# Altium PCB PCB.PcbDoc
Units mm, origin at the board's own origin, x right, y up, seen from the top; angles counter-clockwise.
Board outline 170 x 120 mm, 2 copper layers (Top Layer, Bottom Layer); 137 components, 99 nets, 731 pads, 3 vias.
Unrouted connection lines stored in the file: 228.
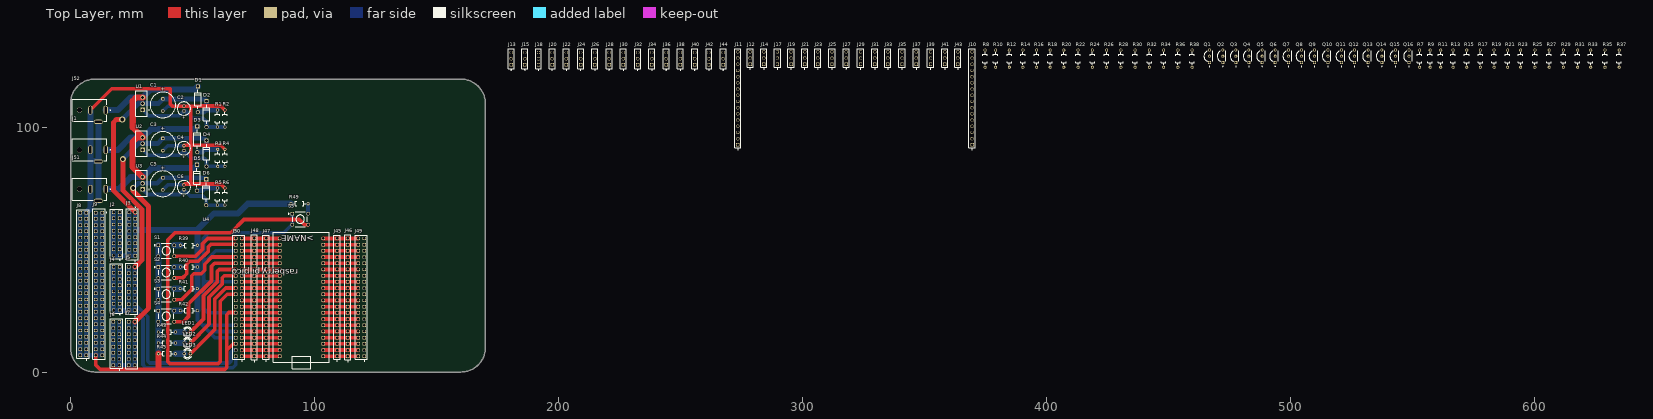
[diagram p0: Top Layer view]
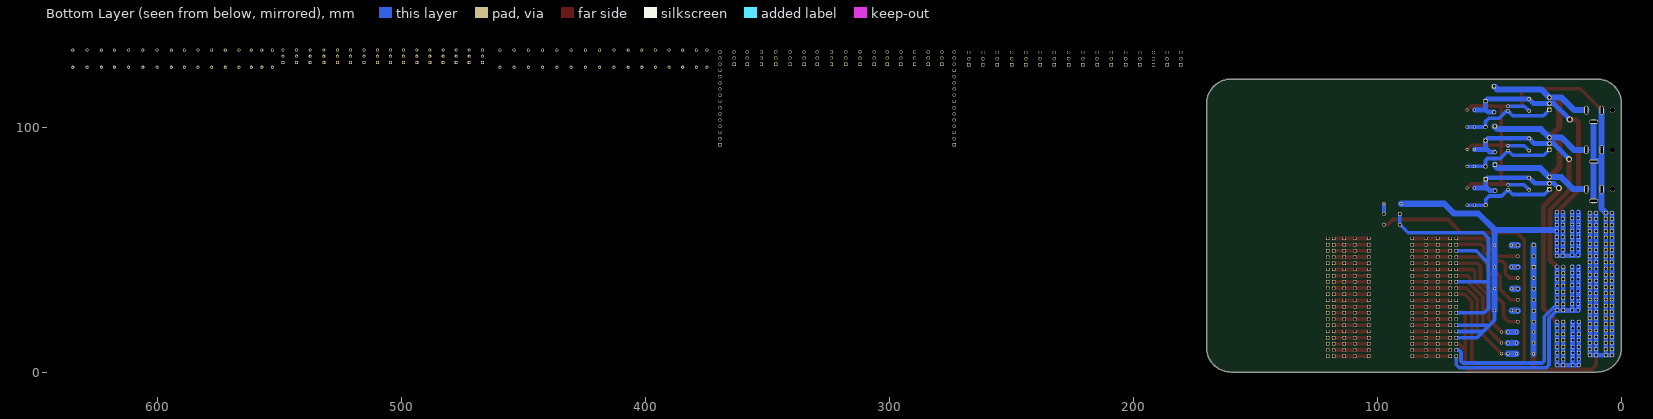
[diagram p1: Bottom Layer view, seen from below]

## Layer stack, top to bottom
Top Solder: solder mask 0.0102, Solder Resist, Dk 3.5
Top Layer: signal copper 0.0356
Dielectric 1: dielectric 0.32, FR-4, Dk 4.8
Bottom Layer: signal copper 0.0356
Bottom Solder: solder mask 0.0102, Solder Resist, Dk 3.5

## Board outline
0.006,10.006 0.006,110.006 cw(c10.006,110.006) 10.006,120.006 160.006,120.006 cw(c160.006,110.006) 170.006,110.006 170.006,10.006 cw(c160.006,10.006) 160.006,0.006 10.006,0.006 cw(c10.006,10.006)

## Design rules (kind name [scope] priority, off if disabled: settings)
Clearance [All] p1: gap=0.254 ignorepadtopadclearanceinfootprint=FALSE
PolygonConnect [All] p1: connectstyle=Relief reliefconductorwidth=0.254 reliefentries=4 polygonreliefangle="90 Angle" airgapwidth=0.254
RoutingCorners [All] p1: cornerstyle=90-Degree minsetback=2.54 maxsetback=2.54
RoutingVias [All] p1: holewidth=0.711 width=1.27 viastyle="Through Hole" minholewidth=0.711 minwidth=1.27 maxholewidth=0.711 maxwidth=1.27
SolderMaskExpansion [All] p1: expansion=0.102 istentingtop=FALSE
Width [All] p1: maxlimit=2.5 minlimit=1.5 preferedwidth=2 minimp=50.000000 maximp=50.000000 favimp=50.000000
29 further rules are at their usual default settings.

## Classes and differential pairs
component class Controller_Schematic: J45 J46 J47 J48 J49 J50 LED1 LED2 LED3 R39 R40 R41 R42 R43 R44 R45 R49 S1 S2 S3 S4 S5 U4
component class LogicShifters_Schematic: J10 J11 J12 J13 J14 J15 J17 J18 J19 J20 J21 J22 J23 J24 J25 J26 J27 J28 J29 J30 J31 J32 J33 J34 J35 J36 J37 J38 J39 J40 J41 J42 J43 J44 Q1 Q2 Q3 Q4 Q5 Q6 Q7 Q8 Q9 Q10 Q11 Q12 Q13 Q14 Q15 Q16 R7 R8 R9 R10 R11 R12 R13 R14 R15 R16 R17 R18 R19 R20 R21 R22 R23 R24 R25 R26 R27 R28 R29 R30 R31 R32 R33 R34 R35 R36 R37 R38
component class PowerSupply_Schematic: C1 C2 C3 C4 C5 C6 D1 D2 D3 D4 D5 D6 J1 J2 J3 J4 J5 J6 J7 J8 J9 J51 J52 R1 R2 R3 R4 R5 R6 U1 U2 U3

## Components (designator, comment, footprint, x,y, rotation, side; value= is the part's Value field where it differs from the comment)
C1 "1000µF" WCAP-ATG5_D10H12.5 37.846,109.434 r90 top
C2 "10µF" WCAP-ATG5_D5H11 46.482,107.95 r270 top
C3 "1000µF" WCAP-ATG5_D10H12.5 37.846,93.218 r90 top
C4 "10µF" WCAP-ATG5_D5H11 46.482,91.71 r270 top
C5 "1000µF" WCAP-ATG5_D10H12.5 37.846,77.129 r90 top
C6 "10µF" WCAP-ATG5_D5H11 46.482,75.708 r270 top
D1 "1N4007" DIOAD1060W80L520D270 52.197,111.76 r270 top
D2 "1N4007" DIOAD1060W80L520D270 55.753,105.664 r270 top
D3 "1N4007" DIOAD1060W80L520D270 51.943,95.377 r270 top
D4 "1N4007" DIOAD1060W80L520D270 55.753,89.535 r270 top
D5 "1N4007" DIOAD1060W80L520D270 51.816,79.629 r270 top
D6 "1N4007" DIOAD1060W80L520D270 55.626,73.694 r270 top
J1 "PJ-057AH" CUI_PJ-057AH 14.408,91.059 r0 top
J2 "TSW-108-07-G-D" SAMTEC_TSW-108-07-G-D 18.923,56.642 r90 top
J3 "SSW-108-01-G-D" SAMTEC_SSW-108-01-G-D 26.543,65.405 r90 top
J4 "TSW-108-07-G-D" SAMTEC_TSW-108-07-G-D 18.923,34.29 r90 top
J5 "SSW-108-01-G-D" SAMTEC_SSW-108-01-G-D 26.416,43.053 r90 top
J6 "TSW-108-07-G-D" SAMTEC_TSW-108-07-G-D 18.796,11.684 r90 top
J7 "SSW-108-01-G-D" SAMTEC_SSW-108-01-G-D 26.416,20.574 r90 top
J8 "TSW-124-07-G-D" SAMTEC_TSW-124-07-G-D 5.207,36.068 r90 top
J9 "SSW-124-01-X-D" SAMTEC_SSW-124-01-X-D 11.684,36.068 r90 top
J10 "TSW-116-07-G-S" SAMTEC_TSW-116-07-G-S 369.443,112.141 r90 top
J11 "SSW-116-01-G-S" SAMTEC_TSW-116-07-G-S 273.431,112.141 r90 top
J12 "TSW-103-07-G-S" SAMTEC_TSW-103-07-G-S 278.511,128.651 r90 top
J13 "SSW-103-01-G-S" SAMTEC_SSW-103-01-G-S 180.594,125.857 r90 top
J14 "TSW-103-07-G-S" SAMTEC_TSW-103-07-G-S 284.099,128.651 r90 top
J15 "SSW-103-01-G-S" SAMTEC_SSW-103-01-G-S 186.182,125.857 r90 top
J17 "TSW-103-07-G-S" SAMTEC_TSW-103-07-G-S 289.687,128.651 r90 top
J18 "SSW-103-01-G-S" SAMTEC_SSW-103-01-G-S 191.77,125.857 r90 top
J19 "TSW-103-07-G-S" SAMTEC_TSW-103-07-G-S 295.275,128.651 r90 top
J20 "SSW-103-01-G-S" SAMTEC_SSW-103-01-G-S 197.358,125.857 r90 top
J21 "TSW-103-07-G-S" SAMTEC_TSW-103-07-G-S 300.863,128.651 r90 top
J22 "SSW-103-01-G-S" SAMTEC_SSW-103-01-G-S 203.2,125.857 r90 top
J23 "TSW-103-07-G-S" SAMTEC_TSW-103-07-G-S 306.197,128.651 r90 top
J24 "SSW-103-01-G-S" SAMTEC_SSW-103-01-G-S 209.042,125.857 r90 top
J25 "TSW-103-07-G-S" SAMTEC_TSW-103-07-G-S 312.039,128.651 r90 top
J26 "SSW-103-01-G-S" SAMTEC_SSW-103-01-G-S 214.884,125.857 r90 top
J27 "TSW-103-07-G-S" SAMTEC_TSW-103-07-G-S 317.881,128.651 r90 top
J28 "SSW-103-01-G-S" SAMTEC_SSW-103-01-G-S 220.726,125.857 r90 top
J29 "TSW-103-07-G-S" SAMTEC_TSW-103-07-G-S 323.723,128.651 r90 top
J30 "SSW-103-01-G-S" SAMTEC_SSW-103-01-G-S 226.568,125.857 r90 top
J31 "TSW-103-07-G-S" SAMTEC_TSW-103-07-G-S 329.565,128.651 r90 top
J32 "SSW-103-01-G-S" SAMTEC_SSW-103-01-G-S 232.41,125.857 r90 top
J33 "TSW-103-07-G-S" SAMTEC_TSW-103-07-G-S 334.899,128.651 r90 top
J34 "SSW-103-01-G-S" SAMTEC_SSW-103-01-G-S 238.252,125.857 r90 top
J35 "TSW-103-07-G-S" SAMTEC_TSW-103-07-G-S 340.741,128.651 r90 top
J36 "SSW-103-01-G-S" SAMTEC_SSW-103-01-G-S 244.094,125.857 r90 top
J37 "TSW-103-07-G-S" SAMTEC_TSW-103-07-G-S 346.583,128.651 r90 top
J38 "SSW-103-01-G-S" SAMTEC_SSW-103-01-G-S 249.936,125.857 r90 top
J39 "TSW-103-07-G-S" SAMTEC_TSW-103-07-G-S 352.425,128.651 r90 top
J40 "SSW-103-01-G-S" SAMTEC_SSW-103-01-G-S 255.778,125.857 r90 top
J41 "TSW-103-07-G-S" SAMTEC_TSW-103-07-G-S 358.267,128.651 r90 top
J42 "SSW-103-01-G-S" SAMTEC_SSW-103-01-G-S 261.62,125.857 r90 top
J43 "TSW-103-07-G-S" SAMTEC_TSW-103-07-G-S 363.601,128.651 r90 top
J44 "SSW-103-01-G-S" SAMTEC_SSW-103-01-G-S 267.462,125.857 r90 top
J45 "TSW-120-07-G-S" SAMTEC_TSW-120-07-G-S 109.22,30.607 r90 top
J46 "SSW-120-01-X-S" SAMTEC_SSW-120-01-X-S 113.665,30.607 r90 top
J47 "TSW-120-07-G-S" SAMTEC_TSW-120-07-G-S 80.137,30.607 r90 top
J48 "SSW-120-01-X-S" SAMTEC_SSW-120-01-X-S 75.311,30.607 r90 top
J49 "TSW-120-07-G-D" SAMTEC_TSW-120-07-G-D 119.126,30.607 r90 top
J50 "TSW-120-07-G-D" SAMTEC_TSW-120-07-G-D 68.961,30.607 r90 top
J51 "PJ-057AH" CUI_PJ-057AH 14.408,74.93 r0 top
J52 "PJ-057AH" CUI_PJ-057AH 14.408,107.315 r0 top
LED1 "TLLR4400" LED3MM 47.879,16.383 r180 top
LED2 "TLLR4400" LED3MM 47.879,11.938 r180 top
LED3 "TLLR4400" LED3MM 47.879,7.493 r180 top
Q1 "2N7000" TO92254P458H750-3 466.725,129.413 r90 top
Q2 "2N7000" TO92254P458H750-3 472.186,129.413 r90 top
Q3 "2N7000" TO92254P458H750-3 477.52,129.413 r90 top
Q4 "2N7000" TO92254P458H750-3 482.854,129.413 r90 top
Q5 "2N7000" TO92254P458H750-3 488.315,129.413 r90 top
Q6 "2N7000" TO92254P458H750-3 493.649,129.413 r90 top
Q7 "2N7000" TO92254P458H750-3 499.11,129.413 r90 top
Q8 "2N7000" TO92254P458H750-3 504.444,129.413 r90 top
Q9 "2N7000" TO92254P458H750-3 509.778,129.413 r90 top
Q10 "2N7000" TO92254P458H750-3 515.239,129.413 r90 top
Q11 "2N7000" TO92254P458H750-3 520.827,129.413 r90 top
Q12 "2N7000" TO92254P458H750-3 526.161,129.413 r90 top
Q13 "2N7000" TO92254P458H750-3 531.749,129.413 r90 top
Q14 "2N7000" TO92254P458H750-3 537.337,129.413 r90 top
Q15 "2N7000" TO92254P458H750-3 542.925,129.413 r90 top
Q16 "2N7000" TO92254P458H750-3 548.513,129.413 r90 top
R1 "1k" RESAD700W45L350D185 60.198,103.886 r90 top
R2 "1.64k" RESAD700W45L350D185 63.246,103.886 r270 top
R3 "1k" RESAD700W45L350D185 60.325,87.757 r90 top
R4 "1k" RESAD700W45L350D185 63.246,87.757 r270 top
R5 "1k" RESAD700W45L350D185 60.198,71.882 r90 top
R6 "3.8k" RESAD700W45L350D185 63.246,71.882 r270 top
R7 "10k" RESAD700W45L350D185 552.831,128.397 r90 top
R8 "10k" RESAD700W45L350D185 374.777,128.397 r90 top
R9 "10k" RESAD700W45L350D185 557.149,128.397 r90 top
R10 "10k" RESAD700W45L350D185 379.095,128.397 r90 top
R11 "10k" RESAD700W45L350D185 561.467,128.397 r90 top
R12 "10k" RESAD700W45L350D185 384.683,128.397 r90 top
R13 "10k" RESAD700W45L350D185 566.547,128.397 r90 top
R14 "10k" RESAD700W45L350D185 390.271,128.397 r90 top
R15 "10k" RESAD700W45L350D185 572.135,128.397 r90 top
R16 "10k" RESAD700W45L350D185 395.859,128.397 r90 top
R17 "10k" RESAD700W45L350D185 577.723,128.397 r90 top
R18 "10k" RESAD700W45L350D185 401.447,128.397 r90 top
R19 "10k" RESAD700W45L350D185 583.311,128.397 r90 top
R20 "10k" RESAD700W45L350D185 407.035,128.397 r90 top
R21 "10k" RESAD700W45L350D185 588.899,128.397 r90 top
R22 "10k" RESAD700W45L350D185 412.877,128.397 r90 top
R23 "10k" RESAD700W45L350D185 594.233,128.397 r90 top
R24 "10k" RESAD700W45L350D185 418.719,128.397 r90 top
R25 "10k" RESAD700W45L350D185 600.075,128.397 r90 top
R26 "10k" RESAD700W45L350D185 424.561,128.397 r90 top
R27 "10k" RESAD700W45L350D185 605.917,128.397 r90 top
R28 "10k" RESAD700W45L350D185 430.403,128.397 r90 top
R29 "10k" RESAD700W45L350D185 611.759,128.397 r90 top
R30 "10k" RESAD700W45L350D185 436.245,128.397 r90 top
R31 "10k" RESAD700W45L350D185 617.601,128.397 r90 top
R32 "10k" RESAD700W45L350D185 442.087,128.397 r90 top
R33 "10k" RESAD700W45L350D185 622.935,128.397 r90 top
R34 "10k" RESAD700W45L350D185 447.929,128.397 r90 top
R35 "10k" RESAD700W45L350D185 628.777,128.397 r90 top
R36 "10k" RESAD700W45L350D185 453.771,128.397 r90 top
R37 "10k" RESAD700W45L350D185 634.619,128.397 r90 top
R38 "10k" RESAD700W45L350D185 459.613,128.397 r90 top
R39 "10k" RESAD700W45L350D185 48.514,51.943 r0 top
R40 "10k" RESAD700W45L350D185 48.514,43.053 r0 top
R41 "10k" RESAD700W45L350D185 48.458,34.163 r0 top
R42 "10k" RESAD700W45L350D185 48.514,25.146 r0 top
R43 "10" RESAD700W45L350D185 39.497,16.383 r0 top
R44 "10" RESAD700W45L350D185 39.497,11.938 r0 top
R45 "10" RESAD700W45L350D185 39.497,7.493 r0 top
R49 "10k" RESAD700W45L350D185 93.853,68.961 r180 top
S1 "FSM8JH" SW_FSM8JH 39.243,49.693 r0 top
S2 "FSM8JH" SW_FSM8JH 39.243,40.767 r0 top
S3 "FSM8JH" SW_FSM8JH 39.243,31.877 r0 top
S4 "FSM8JH" SW_FSM8JH 39.243,22.86 r0 top
S5 "FSM8JH" SW_FSM8JH 94.107,62.611 r0 top
U1 "LM338T-3.3V" TO254P1054X470X1955-3 29.591,109.982 r90 top
U2 "LM338T-5V" TO254P1054X470X1955-3 29.591,93.599 r90 top
U3 "LM338T-6V" TO254P1054X470X1955-3 29.591,77.343 r90 top
U4 "RASPBERRY_PI_PICO" RASPBERRY_PI_PICO 94.615,29.337 r180 top

## Footprints (in the part's own frame and the unit in brackets; to place one, negate y for a bottom-side part, rotate by r counter-clockwise, add the part's x,y. Pads: shape width x height; smd on the part's side, far side on the other; paste and mask are expansions set on the pad)
CUI_PJ-057AH [mm]
  oval 1.8x3.6 hole 0.8 slot 3 at 90 deg: 1(0,0) 2(-6.25,0)
  oval 3.6x1.8 hole 0.8 slot 3 at 0 deg: 3(-3,-4.8)
  round 2.1 hole 2.1 unplated: ""(-10.75,0)
  silkscreen extent -13.75,-4.5 2,4.5, body extent 2.4,-2.9 11.9,11.4, height 5.5
DIOAD1060W80L520D270 [mm]
  round 1.65 hole 1.1: A(5.3,0)
  rect 1.65x1.65 / inner round 1.65 / far side rect 1.65x1.65 hole 1.1: C(-5.3,0)
  silkscreen extent -3.9,-1.35 3.9,1.35, body extent -5.57,-1.35 5.57,1.35, height 2.7
LED3MM [mil]
  round 52 hole 32: A(-50,0) K(50,0)
  silkscreen extent -71,-80 61,80, body extent -60,-62 60,62, height 240
RASPBERRY_PI_PICO [mm]
  rect 1.37x1.37 hole 1.02: 3V3(8.89,12.7) 3V3_EN(8.89,15.24) ADC_VREF(8.89,10.16) AGND(8.89,5.08) GND(8.89,17.78) GND2(8.89,-7.62) GND3(8.89,-20.32) GND4(-8.89,17.78) GND5(-8.89,5.08) GND6(-8.89,-7.62) GND7(-8.89,-20.32) GP0(-8.89,22.86) GP1(-8.89,20.32) GP2(-8.89,15.24) GP3(-8.89,12.7) GP4(-8.89,10.16) GP5(-8.89,7.62) GP6(-8.89,2.54) GP7(-8.89,0) GP8(-8.89,-2.54) GP9(-8.89,-5.08) GP10(-8.89,-10.16) GP11(-8.89,-12.7) GP12(-8.89,-15.24) GP13(-8.89,-17.78) GP14(-8.89,-22.86) GP15(-8.89,-25.4) GP16(8.89,-25.4) GP17(8.89,-22.86) GP18(8.89,-17.78) GP19(8.89,-15.24) GP20(8.89,-12.7) GP21(8.89,-10.16) GP22(8.89,-5.08) GP26_A0(8.89,0) GP27_A1(8.89,2.54) GP28_A2(8.89,7.62) RUN(8.89,-2.54) VBUS(8.89,22.86) VSYS(8.89,20.32)
  silkscreen extent -11.43,-27.94 11.43,27.94, body extent -10.5,-25.5 10.5,26.8, height 3.73
RESAD700W45L350D185 [mm]
  round 1.258 hole 0.75: 1(-3.5,0) 2(3.5,0)
  silkscreen extent -2.55,-0.92 2.55,0.92, body extent -3.72,-0.92 3.72,0.92, height 1.84
SAMTEC_SSW-103-01-G-S [mm]
  rect 1.39x1.39 hole 1.04: 01(0,0)
  round 1.39 hole 1.04: 02(2.54,0) 03(5.08,0)
  silkscreen extent -2.27,-1.21 6.61,1.21
SAMTEC_SSW-108-01-G-D [mm]
  rect 1.37x1.37 hole 1.02: 01(0,0) 02(0,2.54) 03(-2.54,0) 04(-2.54,2.54) 05(-5.08,0) 06(-5.08,2.54) 07(-7.62,0) 08(-7.62,2.54) 09(-10.16,0) 10(-10.16,2.54) 11(-12.7,0) 12(-12.7,2.54) 13(-15.24,0) 14(-15.24,2.54) 15(-17.78,0) 16(-17.78,2.54)
  silkscreen extent -19.31,-1.21 2.27,3.75
SAMTEC_SSW-120-01-X-S [mm]
  rect 1.37x1.37 hole 1.02: 01(-24.13,0) 02(-21.59,0) 03(-19.05,0) 04(-16.51,0) 05(-13.97,0) 06(-11.43,0) 07(-8.89,0) 08(-6.35,0) 09(-3.81,0) 10(-1.27,0) 11(1.27,0) 12(3.81,0) 13(6.35,0) 14(8.89,0) 15(11.43,0) 16(13.97,0) 17(16.51,0) 18(19.05,0) 19(21.59,0) 20(24.13,0)
  silkscreen extent -26.38,-1.2 25.66,1.2
SAMTEC_SSW-124-01-X-D [mm]
  rect 1.37x1.37 hole 1.02: 01(29.21,-1.27) 02(29.21,1.27) 03(26.67,-1.27) 04(26.67,1.27) 05(24.13,-1.27) 06(24.13,1.27) 07(21.59,-1.27) 08(21.59,1.27) 09(19.05,-1.27) 10(19.05,1.27) 11(16.51,-1.27) 12(16.51,1.27) 13(13.97,-1.27) 14(13.97,1.27) 15(11.43,-1.27) 16(11.43,1.27) 17(8.89,-1.27) 18(8.89,1.27) 19(6.35,-1.27) 20(6.35,1.27) 21(3.81,-1.27) 22(3.81,1.27) 23(1.27,-1.27) 24(1.27,1.27) 25(-1.27,-1.27) 26(-1.27,1.27) 27(-3.81,-1.27) 28(-3.81,1.27) 29(-6.35,-1.27) 30(-6.35,1.27) 31(-8.89,-1.27) 32(-8.89,1.27) 33(-11.43,-1.27) 34(-11.43,1.27) 35(-13.97,-1.27) 36(-13.97,1.27) 37(-16.51,-1.27) 38(-16.51,1.27) 39(-19.05,-1.27) 40(-19.05,1.27) 41(-21.59,-1.27) 42(-21.59,1.27) 43(-24.13,-1.27) 44(-24.13,1.27) 45(-26.67,-1.27) 46(-26.67,1.27) 47(-29.21,-1.27) 48(-29.21,1.27)
  silkscreen extent -30.74,-3.23 30.74,2.47
SAMTEC_TSW-103-07-G-S [mm]
  rect 1.37x1.37 hole 1.02: 01(-2.54,0)
  round 1.37 hole 1.02: 02(0,0) 03(2.54,0)
  silkscreen extent -4.56,-1.27 3.81,1.27
SAMTEC_TSW-108-07-G-D [mm]
  rect 1.37x1.37 hole 1.02: 01(-8.89,-1.27) 02(-8.89,1.27) 03(-6.35,-1.27) 04(-6.35,1.27) 05(-3.81,-1.27) 06(-3.81,1.27) 07(-1.27,-1.27) 08(-1.27,1.27) 09(1.27,-1.27) 10(1.27,1.27) 11(3.81,-1.27) 12(3.81,1.27) 13(6.35,-1.27) 14(6.35,1.27) 15(8.89,-1.27) 16(8.89,1.27)
  silkscreen extent -10.91,-2.54 10.16,2.54
SAMTEC_TSW-116-07-G-S [mm]
  rect 1.37x1.37 hole 1.02: 01(-19.05,0)
  round 1.37 hole 1.02: 02(-16.51,0) 03(-13.97,0) 04(-11.43,0) 05(-8.89,0) 06(-6.35,0) 07(-3.81,0) 08(-1.27,0) 09(1.27,0) 10(3.81,0) 11(6.35,0) 12(8.89,0) 13(11.43,0) 14(13.97,0) 15(16.51,0) 16(19.05,0)
  silkscreen extent -21.07,-1.27 20.32,1.27
SAMTEC_TSW-120-07-G-D [mm]
  rect 1.37x1.37 hole 1.02: 01(-24.13,-1.27) 02(-24.13,1.27) 03(-21.59,-1.27) 04(-21.59,1.27) 05(-19.05,-1.27) 06(-19.05,1.27) 07(-16.51,-1.27) 08(-16.51,1.27) 09(-13.97,-1.27) 10(-13.97,1.27) 11(-11.43,-1.27) 12(-11.43,1.27) 13(-8.89,-1.27) 14(-8.89,1.27) 15(-6.35,-1.27) 16(-6.35,1.27) 17(-3.81,-1.27) 18(-3.81,1.27) 19(-1.27,-1.27) 20(-1.27,1.27) 21(1.27,-1.27) 22(1.27,1.27) 23(3.81,-1.27) 24(3.81,1.27) 25(6.35,-1.27) 26(6.35,1.27) 27(8.89,-1.27) 28(8.89,1.27) 29(11.43,-1.27) 30(11.43,1.27) 31(13.97,-1.27) 32(13.97,1.27) 33(16.51,-1.27) 34(16.51,1.27) 35(19.05,-1.27) 36(19.05,1.27) 37(21.59,-1.27) 38(21.59,1.27) 39(24.13,-1.27) 40(24.13,1.27)
  silkscreen extent -26.15,-2.54 25.4,2.54
SAMTEC_TSW-120-07-G-S [mm]
  rect 1.37x1.37 hole 1.02: 01(-24.13,0) 02(-21.59,0) 03(-19.05,0) 04(-16.51,0) 05(-13.97,0) 06(-11.43,0) 07(-8.89,0) 08(-6.35,0) 09(-3.81,0) 10(-1.27,0) 11(1.27,0) 12(3.81,0) 13(6.35,0) 14(8.89,0) 15(11.43,0) 16(13.97,0) 17(16.51,0) 18(19.05,0) 19(21.59,0) 20(24.13,0)
  silkscreen extent -26.15,-1.27 25.4,1.27
SAMTEC_TSW-124-07-G-D [mm]
  rect 1.37x1.37 hole 1.02: 01(-29.21,-1.27) 02(-29.21,1.27) 03(-26.67,-1.27) 04(-26.67,1.27) 05(-24.13,-1.27) 06(-24.13,1.27) 07(-21.59,-1.27) 08(-21.59,1.27) 09(-19.05,-1.27) 10(-19.05,1.27) 11(-16.51,-1.27) 12(-16.51,1.27) 13(-13.97,-1.27) 14(-13.97,1.27) 15(-11.43,-1.27) 16(-11.43,1.27) 17(-8.89,-1.27) 18(-8.89,1.27) 19(-6.35,-1.27) 20(-6.35,1.27) 21(-3.81,-1.27) 22(-3.81,1.27) 23(-1.27,-1.27) 24(-1.27,1.27) 25(1.27,-1.27) 26(1.27,1.27) 27(3.81,-1.27) 28(3.81,1.27) 29(6.35,-1.27) 30(6.35,1.27) 31(8.89,-1.27) 32(8.89,1.27) 33(11.43,-1.27) 34(11.43,1.27) 35(13.97,-1.27) 36(13.97,1.27) 37(16.51,-1.27) 38(16.51,1.27) 39(19.05,-1.27) 40(19.05,1.27) 41(21.59,-1.27) 42(21.59,1.27) 43(24.13,-1.27) 44(24.13,1.27) 45(26.67,-1.27) 46(26.67,1.27) 47(29.21,-1.27) 48(29.21,1.27)
  silkscreen extent -31.23,-2.54 30.48,2.54
SW_FSM8JH [mm]
  rect 1.498x1.498 / inner round 1.498 / far side rect 1.498x1.498 hole 0.99: 1(-3.25,2.25)
  round 1.498 hole 0.99: 2(-3.25,-2.25) 3(3.25,2.25) 4(3.25,-2.25)
  silkscreen extent -4.95,-3 3,3, body extent -3,-3.95 3,3.95, height 9.5
TO254P1054X470X1955-3 [mm]
  rect 1.86x1.86 / inner round 1.86 / far side rect 1.86x1.86 hole 1.24: 1(-2.54,0)
  round 1.86 hole 1.24: 2(0,0) 3(2.54,0)
  silkscreen extent -5.27,-2.64 5.27,2.86, body extent -5.08,-2.35 5.08,2.35, height 15.49
TO92254P458H750-3 [mm]
  rect 1.228x1.228 / inner round 1.228 / far side rect 1.228x1.228 hole 0.72: 1(-2.54,0)
  round 1.228 hole 0.72: 2(0,0) 3(2.54,0)
  silkscreen extent -4.25,-1.27 2.13,2.29, body extent -2.74,-1.27 2.74,2.33, height 8.09
WCAP-ATG5_D5H11 [mm] "Aluminum Electrolytic Capacitors, 5x11mm"
  rrect50% 1.3x1.3 hole 0.8: 1(1,0)
  round 1.3 hole 0.8: 2(-1,0)
  silkscreen extent -2.75,-2.75 2.75,2.75, body extent -2.49,-2.5 2.5,2.5, height 11.31
WCAP-ATG5_D10H12.5 [mm] "Aluminum Electrolytic Capacitors, 10x12.5mm"
  rrect50% 1.4x1.4 hole 0.9: 1(2.5,0)
  round 1.4 hole 0.9: 2(-2.5,0)
  silkscreen extent -5.25,-5.25 5.25,5.25, body extent -4.99,-5 5,5, height 12.81

## Part data
C1 C3 C5: library part 860020375017, "WCAP-ATG5 Aluminum Electrolytic Capacitor, Radial, THT, D10 x H12.5mm, 1000µF, 16V", Capacitance Tolerance=+/-20%, Leakage Current=160µA, Manufacturer="Wurth Elektronik", Operating Temperature Max=105°C, Operating Temperature Min=-40°C, Rated Voltage (DC)=16V, Ripple Current=540mA, Capacitance=1000µF, Category="Aluminum Electrolytic Capacitors", ComponentLink1Description="Website Link", ComponentLink1URL=https://www.we-online.com/redexpert/article/860020375017?ad, ComponentLink2Description="Datasheet Link", ComponentLink2URL=https://www.we-online.com/redexpert/spec/860020375017?ad, Diameter=10mm, Dissipation Factor=15%, Endurance=2000h, Height=12.5mm, Manufacturer Part Number=860020375017, Match Code=WCAP-ATG5, Mount="Through Hole", Packaging="Ammo Pack", Technical Reference=ATDF125102M016DSPA9B000
C2 C4 C6: library part 860020372001, "WCAP-ATG5 Aluminum Electrolytic Capacitor, Radial, THT, D5 x H11mm, 10µF, 16V", Capacitance Tolerance=+/-20%, Leakage Current=3µA, Manufacturer="Wurth Elektronik", Operating Temperature Max=105°C, Operating Temperature Min=-40°C, Rated Voltage (DC)=16V, Ripple Current=35mA, Capacitance=10µF, Category="Aluminum Electrolytic Capacitors", ComponentLink1Description="Website Link", ComponentLink1URL=https://www.we-online.com/redexpert/article/860020372001?ad, ComponentLink2Description="Datasheet Link", ComponentLink2URL=https://www.we-online.com/redexpert/spec/860020372001?ad, Diameter=5mm, Dissipation Factor=15%, Endurance=2000h, Height=11mm, Manufacturer Part Number=860020372001, Match Code=WCAP-ATG5, Mount="Through Hole", Packaging="Ammo Pack", Technical Reference=ATDC110100M016DSPA3B000
D1 D2 D3 D4 D5 D6: "Rectifier Silicon, 1000V, 1 A, DO-41 Case, Solder Leads, 1N Series", Package="DO-41 NTE Electronics", Check_prices=https://www.snapeda.com/parts/1N4007/NTE+Electronics/view-part/?ref=eda, MF="NTE Electronics, Inc.", MP=1N4007, SnapEDA_Link=https://www.snapeda.com/parts/1N4007/NTE+Electronics/view-part/?ref=snap
J1 J51 J52: "2.0 x 6.3 mm, 5.0 A, Horizontal, Through Hole, Pick-n-Place Top, Dc Power Jack Connector", Package=None, Check_prices=https://www.snapeda.com/parts/PJ-057AH/Same+Sky/view-part/?ref=eda, MF="Same Sky", MP=PJ-057AH, SnapEDA_Link=https://www.snapeda.com/parts/PJ-057AH/Same+Sky/view-part/?ref=snap
J2 J3 J4 J5 J6 J7 J8 J9 J10 J12 J13 J14 J15 J17 J18 J19 J20 J21 J22 J23 J24 J25 J26 J27 J28 J29 J30 J31 J32 J33 J34 J35 J36 J37 J38 J39 J40 J41 J42 J43 J44 J45 J47 J49 J50: Package=None, Availability=Unavailable, MF=Samtec, Price=None
  J2 J4 J6: MP=TSW-108-07-G-D
  J3 J5 J7: MP=SSW-108-01-G-D
  J8: MP=TSW-124-07-G-D
  J9: MP=SSW-124-01-X-D
  J10: MP=TSW-116-07-G-S
  J12 J14 J17 J19 J21 J23 J25 J27 J29 J31 J33 J35 J37 J39 J41 J43: MP=TSW-103-07-G-S
  J13 J15 J18 J20 J22 J24 J26 J28 J30 J32 J34 J36 J38 J40 J42 J44: MP=SSW-103-01-G-S
  J45 J47: MP=TSW-120-07-G-S
  J49 J50: MP=TSW-120-07-G-D
J11: library part TSW-116-07-G-S, Package=None, Availability=Unavailable, MF=Samtec, MP=TSW-116-07-G-S, Price=None
J46 J48: "SSW - Samtec 2.54mm Single Row Straight Socket Strip 8.5 Profile - Fast Stock", Package=None, Check_prices=https://www.snapeda.com/parts/SSW-120-01-G-S/Samtec/view-part/?ref=eda, MF=Samtec, MP=SSW-120-01-G-S, SnapEDA_Link=https://www.snapeda.com/parts/SSW-120-01-G-S/Samtec/view-part/?ref=snap
LED1 LED2 LED3: "Red 619nm LED Indication - Discrete 1.9V Radial", Package=None, Check_prices=https://www.snapeda.com/parts/TLLR4400/Vishay+Semiconductor+Opto+Division/view-part/?ref=eda, MF=Vishay, MP=TLLR4400, SnapEDA_Link=https://www.snapeda.com/parts/TLLR4400/Vishay+Semiconductor+Opto+Division/view-part/?ref=snap
Q1 Q2 Q3 Q4 Q5 Q6 Q7 Q8 Q9 Q10 Q11 Q12 Q13 Q14 Q15 Q16: "N-Channel 60 V 200mA (Ta) Through Hole TO-92", Package="TO-226-3 NTE Electronics, Inc.", Check_prices=https://www.snapeda.com/parts/2N7000/NTE+Electronics/view-part/?ref=eda, MF="NTE Electronics, Inc.", MP=2N7000, SnapEDA_Link=https://www.snapeda.com/parts/2N7000/NTE+Electronics/view-part/?ref=snap
R1 R2 R3 R4 R5 R6 R7 R8 R9 R10 R11 R12 R13 R14 R15 R16 R17 R18 R19 R20 R21 R22 R23 R24 R25 R26 R27 R28 R29 R30 R31 R32 R33 R34 R35 R36 R37 R38 R39 R40 R41 R42 R43 R44 R45 R49: library part 3-1623927-1, "1 MOhms Â±5% 0.25W, 1/4W Through Hole Resistor Axial - Carbon Film", Package=None, Check_prices=https://www.snapeda.com/parts/3-1623927-1/TE+Connectivity/view-part/?ref=eda, MF="TE Connectivity", MP=3-1623927-1, SnapEDA_Link=https://www.snapeda.com/parts/3-1623927-1/TE+Connectivity/view-part/?ref=snap
S1 S2 S3 S4 S5: "Tactile Switch SPST-NO Top Actuated Through Hole", Package=None, Availability="In Stock", Check_prices=https://www.snapeda.com/parts/FSM8JH/TE+Connectivity+ALCOSWITCH+Switches/view-part/?ref=eda, MF="TE Connectivity", MP=FSM8JH, Price=None, SnapEDA_Link=https://www.snapeda.com/parts/FSM8JH/TE+Connectivity+ALCOSWITCH+Switches/view-part/?ref=snap
U1 U2 U3: library part LM338T, "5-A, 40-V, low-IQ, adjustable linear voltage regulator 3-TO-220 0 to 125", Package="TO-220-3 Texas Instruments", Check_prices=https://www.snapeda.com/parts/LM338T/Texas+Instruments/view-part/?ref=eda, MF="Texas Instruments", MP=LM338T, SnapEDA_Link=https://www.snapeda.com/parts/LM338T/Texas+Instruments/view-part/?ref=snap
U4: "Raspberry Pi Board, Arm Cortex-M0+; Core Architecture:Arm; Core Sub-Architecture:Cortex-M0+; Kit Contents:Raspberry Pi Pico Board; No. Of Bits:32Bit; Silicon Core Number:Rp2040; Silicon Manufacturer:Raspberry Pi", Package=None, Check_prices=https://www.snapeda.com/parts/RASPBERRY%20PI%20PICO/Raspberry+Pi/view-part/?ref=eda, MF="Raspberry Pi", MP="RASPBERRY PI PICO", SnapEDA_Link=https://www.snapeda.com/parts/RASPBERRY%20PI%20PICO/Raspberry+Pi/view-part/?ref=snap

## Via types
v1: diameter 2.5/2.5 (per signal layer), hole 1.5, Top Layer to Bottom Layer, 3 vias

## Nets (pads, with @x,y where several pads share a name; then routed paths per layer and width w, separated by ;. In a path a pad name is that pad's centre, name@x,y a point inside that pad or via, vN(x,y) a via of type N, cw(c..) or ccw(c..) an arc to the next point about the centre after c; other vN are vias at no path point)
0V: C1.2 C2.2 C3.2 C4.2 C5.2 C6.2 J1.2 J1.3 J8.01 J8.02 J8.03 J8.04 J8.05 J8.06 J8.07 J8.08 J8.09 J8.10 J8.11 J8.12 J8.13 J8.14 J8.15 J8.16 J8.17 J8.18 J8.19 J8.20 J8.21 J8.22 J8.23 J8.24 J8.25 J8.26 J8.27 J8.28 J8.29 J8.30 J8.31 J8.32 J8.33 J8.34 J8.35 J8.36 J8.37 J8.38 J8.39 J8.40 J8.41 J8.42 J8.43 J8.44 J8.45 J8.46 J8.47 J8.48 J9.01 J9.02 J9.03 J9.04 J9.05 J9.06 J9.07 J9.08 J9.09 J9.10 J9.11 J9.12 J9.13 J9.14 J9.15 J9.16 J9.17 J9.18 J9.19 J9.20 J9.21 J9.22 J9.23 J9.24 J9.25 J9.26 J9.27 J9.28 J9.29 J9.30 J9.31 J9.32 J9.33 J9.34 J9.35 J9.36 J9.37 J9.38 J9.39 J9.40 J9.41 J9.42 J9.43 J9.44 J9.45 J9.46 J9.47 J9.48 J12.03 J13.01 J14.03 J15.01 J17.03 J18.01 J19.03 J20.01 J21.03 J22.01 J23.03 J24.01 J25.03 J26.01 J27.03 J28.01 J29.03 J30.01 J31.03 J32.01 J33.03 J34.01 J35.03 J36.01 J37.03 J38.01 J39.03 J40.01 J41.03 J42.01 J43.03 J44.01 J49.05 J49.15 J49.25 J49.35 J50.06 J50.16 J50.26 J50.36 J51.2 J51.3 J52.2 J52.3 R2.1 R4.1 R6.1 R43.1 R44.1 R45.1 S1.1 S1.2 S2.1 S2.2 S3.1 S3.2 S4.1 S4.2 S5.1 S5.2 | length 737.7
  Top Layer w1.5: J52.2 8.158,108.134 8.296,108.272 9.115,108.272 16.921,116.078 40.894,116.078 40.894,109.829 41.773,108.95 C2.2 49.276,108.95 ; J9.48 10.414,2.794 12.192,1.016 63.129,1.016 64.008,1.895 64.008,8.9 ; C6.2 46.789,77.015 49.276,77.015 ; C4.2 46.662,92.89 49.276,92.89 ; R6.1 61.613,77.015 49.276,77.015 ; R4.1 61.613,92.89 49.276,92.89 ; R2.1 61.613,109.019 53.713,109.019 53.644,108.95 49.276,108.95 ; J50.06 66.665,11.557 64.008,8.9 ; J50.16 67.564,24.384 64.897,24.384 64.008,23.495 64.008,8.9 ; 49.276,77.015 49.276,92.89 ; 49.276,92.89 49.276,108.95
  Top Layer w2.5: 35.997,1.834 R45.1
  Bottom Layer w1.5: J52.3 J52.3@11.43,102.537 ; J9.17 12.97,44.958 J9.17@13.196,45.184 ; C5.2 39.925,76.708 C6.2 ; C3.2 39.838,92.71 C4.2 ; C1.2 39.862,108.95 C2.2 ; J50.16 56.261,24.257 54.483,26.035 54.483,37.836 ; J50.26 55.362,36.957 54.483,37.836 ; J50.36 59.563,49.657 54.483,44.577 ; S5.1 S5.2 90.714,60.361 87.376,57.023 56.642,57.023 54.483,54.864 54.483,44.577 ; 54.483,37.836 54.483,44.577
  Bottom Layer w2: J8.48 J8.46 J8.44 J8.42 J8.40 J8.38 J8.36 J8.34 J8.32 J8.30 J8.28 J8.26 J8.24 J8.22 J8.20 J8.18 J8.16 J8.14 J8.12 J8.10 J8.08 J8.06 J8.04 J8.02 J8.01 ; J8.47 J8.45 J8.43 J8.41 J8.39 J8.37 J8.35 J8.33 J8.31 J8.29 J8.27 J8.25 J8.23 J8.21 J8.19 J8.17 J8.15 J8.13 J8.11 J8.09 J8.07 J8.05 J8.03 J8.01 ; J9.02 J9.04 J9.06 J9.08 J9.10 J9.12 J9.14 J9.16 J9.18 J9.20 J9.22 J9.24 J9.26 J9.28 J9.30 J9.32 J9.34 J9.36 J9.38 J9.40 J9.42 J9.44 J9.46 J9.48 ; J9.01 J9.03 J9.05 J9.07 J9.09 J9.11 J9.13 J9.15 J9.17 J9.19 J9.21 J9.23 J9.25 J9.27 J9.29 J9.31 J9.33 J9.35 J9.37 J9.39 J9.41 J9.43 J9.45 J9.47 J9.48 ; J8.01 J9.48
  Bottom Layer w2.5: J8.47 8.158,66.959 J51.2 8.158,86.487 ; J52.2 J1.2 8.158,86.487 ; J51.3 J1.3 ; J52.3 J1.3 ; S1.1 S1.2 S2.1 S2.2 S3.1 S3.2 S4.1 S4.2 35.993,7.497 R45.1 ; 8.158,86.487 11.18,86.487 J1.3
3.3V: C1.1 D1.A D2.C J2.01 J2.02 J2.03 J2.04 J2.05 J2.06 J2.07 J2.08 J2.09 J2.10 J2.11 J2.12 J2.13 J2.14 J2.15 J2.16 J3.01 J3.02 J3.03 J3.04 J3.05 J3.06 J3.07 J3.08 J3.09 J3.10 J3.11 J3.12 J3.13 J3.14 J3.15 J3.16 J50.08 J50.10 J50.12 Q1.2 Q2.2 Q3.2 Q4.2 Q5.2 Q6.2 Q7.2 Q8.2 Q9.2 Q10.2 Q11.2 Q12.2 Q13.2 Q14.2 Q15.2 Q16.2 R1.2 R8.2 R10.2 R12.2 R14.2 R16.2 R18.2 R20.2 R22.2 R24.2 R26.2 R28.2 R30.2 R32.2 R34.2 R36.2 R38.2 R39.2 R40.2 R41.2 R42.2 R49.2 U1.2 | length 323.2
  Top Layer w2: v1(21.209,103.505) 18.825,103.505 17.653,102.333 17.653,74.295 J3.01
  Bottom Layer w1.5: R42.2 52.014,21.265 54.102,19.177 ; D1.A D1.A@52.226,106.489 ; 55.208,111.934 55.753,111.389 D2.C ; 55.753,107.696 56.063,107.386 ; J50.08 59.182,14.097 56.642,16.637 ; J50.10 56.642,16.637 ; J50.12 54.102,19.177 ; 54.102,19.177 56.642,16.637
  Bottom Layer w2: J2.16 J2.14 J2.12 J2.10 J2.08 J2.06 J2.04 J2.02 17.78,47.625 J3.16 ; J2.01 J2.03 J2.05 J2.07 J2.09 J2.11 J2.13 J2.15 ; v1(21.209,103.505) 27.686,109.982 U1.2 ; J3.02 J3.04 J3.06 J3.08 J3.10 J3.12 J3.14 J3.16 ; J3.01 J3.03 J3.05 J3.07 J3.09 J3.11 J3.13 J3.15 J3.16 ; U1.2@29.845,109.982 36.021,109.982 C1.1@37.973,111.934 ; C1.1 55.208,111.934 ; D1.A@52.226,106.489 54.546,106.489 55.753,107.696 D2.C ; 56.063,107.386 R1.2
  Bottom Layer w2.5: J3.07@26.995,58.237 52.014,58.237 ; R42.2 R40.2 R39.2 52.014,58.237 ; R49.2 72.644,68.961 68.707,65.024 58.801,65.024 52.014,58.237
5V: C3.1 D3.A D4.C J4.01 J4.02 J4.03 J4.04 J4.05 J4.06 J4.07 J4.08 J4.09 J4.10 J4.11 J4.12 J4.13 J4.14 J4.15 J4.16 J5.01 J5.02 J5.03 J5.04 J5.05 J5.06 J5.07 J5.08 J5.09 J5.10 J5.11 J5.12 J5.13 J5.14 J5.15 J5.16 J50.02 J50.04 R3.2 R7.2 R9.2 R11.2 R13.2 R15.2 R17.2 R19.2 R21.2 R23.2 R25.2 R27.2 R29.2 R31.2 R33.2 R35.2 R37.2 U2.2 | length 312.1
  Top Layer w2: v1(21.463,87.249) 21.463,74.422 29.337,66.548 29.337,45.974 J5.01
  Bottom Layer w1.5: J5.15 29.718,21.971 29.718,2.95 30.89,1.778 66.519,1.778 67.691,2.95 J50.02 ; J5.13 31.623,22.606 31.623,4.562 32.502,3.683 64.907,3.683 65.786,4.562 65.786,8.138 66.665,9.017 J50.04 ; D3.A D3.A@51.972,90.106 ; 55.062,91.257 54.832,91.027 55.753,91.948 ; D4.C@55.678,94.927 55.678,94.91 D4.C
  Bottom Layer w2: J4.16 J4.14 J4.12 J4.10 J4.08 J4.06 J4.04 J4.02 17.78,25.273 J5.16 ; J4.01 J4.03 J4.05 J4.07 J4.09 J4.11 J4.13 J4.15 ; v1(21.463,87.249) 27.813,93.599 U2.2 35.727,93.599 C3.1 ; J5.02 J5.04 J5.06 J5.08 J5.10 J5.12 J5.14 J5.16 ; J5.01 J5.03 J5.05 J5.07 J5.09 J5.11 J5.13 J5.15 J5.16 ; C3.1@37.934,95.806 54.799,95.806 D4.C@55.678,94.927 ; D3.A@51.972,90.106 53.911,90.106 54.832,91.027 ; 55.062,91.257 R3.2 ; 55.753,91.948 D4.C
6V: C5.1 D5.A D6.C J6.01 J6.02 J6.03 J6.04 J6.05 J6.06 J6.07 J6.08 J6.09 J6.10 J6.11 J6.12 J6.13 J6.14 J6.15 J6.16 J7.01 J7.02 J7.03 J7.04 J7.05 J7.06 J7.07 J7.08 J7.09 J7.10 J7.11 J7.12 J7.13 J7.14 J7.15 J7.16 J12.02 J13.02 J14.02 J15.02 J17.02 J18.02 J19.02 J20.02 J21.02 J22.02 J23.02 J24.02 J25.02 J26.02 J27.02 J28.02 J29.02 J30.02 J31.02 J32.02 J33.02 J34.02 J35.02 J36.02 J37.02 J38.02 J39.02 J40.02 J41.02 J42.02 J43.02 J44.02 R5.2 U3.2 | length 184.8
  Top Layer w2: v1(25.654,75.438) 25.654,74.168 32.004,67.818 32.004,26.162 J7.01
  Bottom Layer w1.5: 53.882,74.329 53.975,74.422 54.102,74.422 ; 55.062,75.382 54.864,75.184 55.626,75.946
  Bottom Layer w2: J6.16 J6.14 J6.12 J6.10 J6.08 J6.06 J6.04 J6.02 J6.01 ; J6.15 J6.13 J6.11 J6.09 J6.07 J6.05 J6.03 J6.01 ; J7.02 J7.04 J7.06 J7.08 J7.10 J7.12 J7.14 J7.16 ; v1(25.654,75.438) 25.789,75.438 27.694,77.343 U3.2 35.56,77.343 C5.1 55.128,79.629 55.626,79.131 D6.C 55.626,75.946 ; J7.01 J7.03 J7.05 J7.07 J7.09 J7.11 J7.13 J7.15 J7.16 ; D5.A 53.882,74.329 ; 54.102,74.422 54.864,75.184 ; 55.062,75.382 R5.2 ; J6.01 J7.16
12V: D1.C D3.C D5.C J1.1 J51.1 J52.1 U1.3 U2.3 U3.3 | length 167.5
  Top Layer w2.5: U3.3 25.4,84.074 25.4,94.107 27.432,96.139 U2.3 25.527,100.203 25.527,111.058 26.991,112.522 U1.3
  Bottom Layer w2: J1.1@14.351,91.002 J1.1 ; J52.1@14.351,107.258 J52.1
  Bottom Layer w2.5: J51.1 19.758,74.93 24.711,79.883 U3.3 33.274,83.566 50.8,83.566 51.816,84.582 D5.C ; J1.1 19.509,91.059 24.589,96.139 U2.3 33.02,99.568 50.834,99.568 D3.C ; J52.1 19.446,107.315 24.653,112.522 U1.3 32.893,115.824 50.961,115.824 D1.C
"LogicShifter1 HV": J10.01 J11.01 J12.01 J13.03 Q1.3 R7.1
"LogicShifter1 LV": J49.01 Q1.1 R8.1
"LogicShifter2 HV": J10.02 J11.02 J14.01 J15.03 Q2.3 R9.1
"LogicShifter2 LV": J49.03 Q2.1 R10.1
"LogicShifter3 HV": J10.03 J11.03 J17.01 J18.03 Q3.3 R11.1
"LogicShifter3 LV": J49.07 Q3.1 R12.1
"LogicShifter4 HV": J10.04 J11.04 J19.01 J20.03 Q4.3 R13.1
"LogicShifter4 LV": J49.09 Q4.1 R14.1
"LogicShifter5 HV": J10.05 J11.05 J21.01 J22.03 Q5.3 R15.1
"LogicShifter5 LV": J49.11 Q5.1 R16.1
"LogicShifter6 HV": J10.06 J11.06 J23.01 J24.03 Q6.3 R17.1
"LogicShifter6 LV": J49.13 Q6.1 R18.1
"LogicShifter7 HV": J10.07 J11.07 J25.01 J26.03 Q7.3 R19.1
"LogicShifter7 LV": J49.17 Q7.1 R20.1
"LogicShifter8 HV": J10.08 J11.08 J27.01 J28.03 Q8.3 R21.1
"LogicShifter8 LV": J49.19 Q8.1 R22.1
"LogicShifter9 HV": J10.09 J11.09 J29.01 J30.03 Q9.3 R23.1
"LogicShifter9 LV": J49.21 Q9.1 R24.1
"LogicShifter10 HV": J10.10 J11.10 J31.01 J32.03 Q10.3 R25.1
"LogicShifter10 LV": J49.23 Q10.1 R26.1
"LogicShifter11 HV": J10.11 J11.11 J33.01 J34.03 Q11.3 R27.1
"LogicShifter11 LV": J49.27 Q11.1 R28.1
"LogicShifter12 HV": J10.12 J11.12 J35.01 J36.03 Q12.3 R29.1
"LogicShifter12 LV": J49.29 Q12.1 R30.1
"LogicShifter13 HV": J10.13 J11.13 J37.01 J38.03 Q13.3 R31.1
"LogicShifter13 LV": J49.31 Q13.1 R32.1
"LogicShifter14 HV": J10.14 J11.14 J39.01 J40.03 Q14.3 R33.1
"LogicShifter14 LV": J49.33 Q14.1 R34.1
"LogicShifter15 HV": J10.15 J11.15 J41.01 J42.03 Q15.3 R35.1
"LogicShifter15 LV": J49.37 Q15.1 R36.1
"LogicShifter16 HV": J10.16 J11.16 J43.01 J44.03 Q16.3 R37.1
"LogicShifter16 LV": J49.39 Q16.1 R38.1
NetC2_1: C2.1 D2.A R1.1 R2.2 U1.1 | length 39.5
  Bottom Layer w1.5: U1.1 32.004,105.029 44.561,105.029 C2.1 47.101,106.95 50.102,103.95 54.419,103.95 55.724,102.645 55.724,100.393 D2.A 55.775,100.386 R1.1 R2.2
NetC4_1: C4.1 D4.A R3.1 R4.2 U2.1 | length 39.5
  Bottom Layer w1.5: U2.1 31.877,88.773 44.545,88.773 C4.1 49.689,87.503 54.874,87.503 55.753,86.624 D4.A 55.775,84.257 R3.1 R4.2
NetC6_1: C6.1 D6.A R5.1 R6.2 U3.1 | length 39.3
  Bottom Layer w1.5: U3.1 31.623,72.771 44.545,72.771 C6.1 49.054,72.136 54.229,72.136 55.626,70.739 D6.A 55.638,68.382 R5.1 R6.2
NetLED1_K: LED1.K R43.2 | length 3.6
  Bottom Layer w2.5: R43.2 LED1.K
NetLED2_K: LED2.K R44.2 | length 3.6
  Bottom Layer w2.5: R44.2 LED2.K
NetLED3_K: LED3.K R45.2 | length 3.6
  Bottom Layer w2.5: R45.2 LED3.K
NetR39_1: R39.1 S1.3 | length 2.6
  Bottom Layer w1.5: S1.3@42.418,51.982 S1.3@42.493,51.907
  Bottom Layer w2.5: S1.3 R39.1
NetR40_1: R40.1 S2.3 | length 2.5
  Bottom Layer w1.5: R40.1@44.978,43.017 R40.1
  Bottom Layer w2.5: S2.3 R40.1@44.978,43.017
NetR41_1: R41.1 S3.3 | length 2.5
  Bottom Layer w1.5: R41.1@44.922,34.127 R41.1
  Bottom Layer w2.5: S3.3 R41.1@44.922,34.127
NetR42_1: R42.1 S4.3 | length 2.5
  Bottom Layer w1.5: R42.1@44.978,25.11 R42.1
  Bottom Layer w2.5: S4.3 R42.1@44.978,25.11
NetR49_1: R49.1 S5.3 | length 4.1
  Bottom Layer w1.5: R49.1 97.353,64.865 S5.3
"RPI PICO JMP PIN21": J50.40 S1.4 | length 29.6
  Top Layer w1.5: S1.4 51.253,47.443 54.102,50.292 54.102,52.578 56.261,54.737 J50.40
"RPI PICO JMP PIN22": J50.38 S2.4 | length 34.3
  Top Layer w1.5: S2.4 45.883,38.517 47.625,40.259 47.625,44.196 48.768,45.339 52.324,45.339 56.515,49.53 56.515,51.308 57.531,52.324 67.564,52.324 J50.38
"RPI PICO JMP PIN24": J50.34 S3.4 | length 37.3
  Top Layer w1.5: S3.4 45.502,29.627 49.657,33.782 49.657,39.418 50.536,40.297 51.778,40.297 51.816,40.259 53.594,40.259 54.991,41.656 54.991,44.196 57.912,47.117 J50.34
"RPI PICO JMP PIN25": J50.32 S4.4 | length 41.7
  Top Layer w1.5: S4.4 46.264,20.61 48.387,22.733 48.387,27.94 57.785,37.338 57.785,43.307 59.055,44.577 J50.32
"RPI PICO JMP PIN26": J50.30 LED1.A | length 37.3
  Top Layer w1.5: LED1.A 54.483,21.717 54.483,31.242 60.071,36.83 60.071,41.158 60.95,42.037 J50.30
"RPI PICO JMP PIN27": J50.28 LED2.A | length 37.9
  Top Layer w1.5: LED2.A 56.769,19.558 56.769,30.607 62.23,36.068 62.23,38.618 63.109,39.497 J50.28
"RPI PICO JMP PIN29": J50.24 LED3.A | length 37
  Top Layer w1.5: LED3.A 59.182,17.526 59.182,29.972 63.627,34.417 J50.24
"RPI PICO JMP PIN30": J50.22 S5.4 | length 166.2
  Top Layer w1.5: J50.22 64.262,31.877 61.341,28.956 61.341,4.308 60.462,3.429 40.757,3.429 39.878,4.308 39.878,54.102 42.799,57.023 65.659,57.023 71.12,62.484 93.726,62.484 95.849,60.361 S5.4
  Bottom Layer w1.5: S5.4 S5.4@97.448,60.452
"RPI PICO JMP PIN31": J50.20
"RPI PICO JMP PIN32": J50.18
"RPI PICO JMP PIN34": J50.14
"RPI PICO PIN1": J45.01 J46.01 J49.02 U4.GP0 | length 14.4
  Top Layer w1.5: U4.GP0 J45.01 J46.01 J49.02
"RPI PICO PIN2": J45.02 J46.02 J49.04 U4.GP1 | length 14.4
  Top Layer w1.5: U4.GP1 J45.02 J46.02 J49.04
"RPI PICO PIN3": J45.03 J46.03 J49.06 U4.GND4 | length 14.4
  Top Layer w1.5: U4.GND4 J45.03 J46.03 J49.06
"RPI PICO PIN4": J45.04 J46.04 J49.08 U4.GP2 | length 14.4
  Top Layer w1.5: U4.GP2 J45.04 J46.04 J49.08
"RPI PICO PIN5": J45.05 J46.05 J49.10 U4.GP3 | length 14.4
  Top Layer w1.5: U4.GP3 J45.05 J46.05 J49.10
"RPI PICO PIN6": J45.06 J46.06 J49.12 U4.GP4 | length 14.4
  Top Layer w1.5: U4.GP4 J45.06 J46.06 J49.12
"RPI PICO PIN7": J45.07 J46.07 J49.14 U4.GP5 | length 14.4
  Top Layer w1.5: U4.GP5 J45.07 J46.07 J49.14
"RPI PICO PIN8": J45.08 J46.08 J49.16 U4.GND5 | length 14.4
  Top Layer w1.5: U4.GND5 J45.08 J46.08 J49.16
"RPI PICO PIN9": J45.09 J46.09 J49.18 U4.GP6 | length 14.4
  Top Layer w1.5: U4.GP6 J45.09 J46.09 J49.18
"RPI PICO PIN10": J45.10 J46.10 J49.20 U4.GP7 | length 14.4
  Top Layer w1.5: U4.GP7 J45.10 J46.10 J49.20
"RPI PICO PIN11": J45.11 J46.11 J49.22 U4.GP8 | length 14.4
  Top Layer w1.5: U4.GP8 J45.11 J46.11 J49.22
"RPI PICO PIN12": J45.12 J46.12 J49.24 U4.GP9 | length 14.4
  Top Layer w1.5: U4.GP9 J45.12 J46.12 J49.24
"RPI PICO PIN13": J45.13 J46.13 J49.26 U4.GND6 | length 14.4
  Top Layer w1.5: U4.GND6 J45.13 J46.13 J49.26
"RPI PICO PIN14": J45.14 J46.14 J49.28 U4.GP10 | length 14.4
  Top Layer w1.5: U4.GP10 J45.14 J46.14 J49.28
"RPI PICO PIN15": J45.15 J46.15 J49.30 U4.GP11 | length 14.4
  Top Layer w1.5: U4.GP11 J45.15 J46.15 J49.30
"RPI PICO PIN16": J45.16 J46.16 J49.32 U4.GP12 | length 14.4
  Top Layer w1.5: U4.GP12 J45.16 J46.16 J49.32
"RPI PICO PIN17": J45.17 J46.17 J49.34 U4.GP13 | length 14.4
  Top Layer w1.5: U4.GP13 J45.17 J46.17 J49.34
"RPI PICO PIN18": J45.18 J46.18 J49.36 U4.GND7 | length 14.4
  Top Layer w1.5: U4.GND7 J45.18 J46.18 J49.36
"RPI PICO PIN19": J45.19 J46.19 J49.38 U4.GP14 | length 14.4
  Top Layer w1.5: U4.GP14 J45.19 J46.19 J49.38
"RPI PICO PIN20": J45.20 J46.20 J49.40 U4.GP15 | length 14.4
  Top Layer w1.5: U4.GP15 J45.20 J46.20 J49.40
"RPI PICO PIN21": J47.20 J48.20 J50.39 U4.GP16 | length 15.5
  Top Layer w1.5: J50.39 J48.20 J47.20 U4.GP16
"RPI PICO PIN22": J47.19 J48.19 J50.37 U4.GP17 | length 15.5
  Top Layer w1.5: J50.37 J48.19 J47.19 U4.GP17
"RPI PICO PIN23": J47.18 J48.18 J50.35 U4.GND3 | length 15.5
  Top Layer w1.5: J50.35 J48.18 J47.18 U4.GND3
"RPI PICO PIN24": J47.17 J48.17 J50.33 U4.GP18 | length 15.5
  Top Layer w1.5: J50.33 J48.17 J47.17 U4.GP18
"RPI PICO PIN25": J47.16 J48.16 J50.31 U4.GP19 | length 15.5
  Top Layer w1.5: J50.31 J48.16 J47.16 U4.GP19
"RPI PICO PIN26": J47.15 J48.15 J50.29 U4.GP20 | length 15.5
  Top Layer w1.5: J50.29 J48.15 J47.15 U4.GP20
"RPI PICO PIN27": J47.14 J48.14 J50.27 U4.GP21 | length 15.5
  Top Layer w1.5: J50.27 U4.GP21
"RPI PICO PIN28": J47.13 J48.13 J50.25 U4.GND2 | length 15.5
  Top Layer w1.5: J50.25 U4.GND2
"RPI PICO PIN29": J47.12 J48.12 J50.23 U4.GP22 | length 15.5
  Top Layer w1.5: J50.23 U4.GP22
"RPI PICO PIN30": J47.11 J48.11 J50.21 U4.RUN | length 15.5
  Top Layer w1.5: J50.21 U4.RUN
"RPI PICO PIN31": J47.10 J48.10 J50.19 U4.GP26_A0 | length 15.5
  Top Layer w1.5: J50.19 U4.GP26_A0
"RPI PICO PIN32": J47.09 J48.09 J50.17 U4.GP27_A1 | length 15.5
  Top Layer w1.5: J50.17 U4.GP27_A1
"RPI PICO PIN33": J47.08 J48.08 J50.15 U4.AGND | length 15.5
  Top Layer w1.5: J50.15 U4.AGND
"RPI PICO PIN34": J47.07 J48.07 J50.13 U4.GP28_A2 | length 15.5
  Top Layer w1.5: J50.13 U4.GP28_A2
"RPI PICO PIN35": J47.06 J48.06 J50.11 U4.ADC_VREF | length 15.5
  Top Layer w1.5: J50.11 U4.ADC_VREF
"RPI PICO PIN36": J47.05 J48.05 J50.09 U4.3V3 | length 15.5
  Top Layer w1.5: J50.09 U4.3V3
"RPI PICO PIN37": J47.04 J48.04 J50.07 U4.3V3_EN | length 15.5
  Top Layer w1.5: J50.07 U4.3V3_EN
"RPI PICO PIN38": J47.03 J48.03 J50.05 U4.GND | length 15.5
  Top Layer w1.5: J50.05 U4.GND
"RPI PICO PIN39": J47.02 J48.02 J50.03 U4.VSYS | length 15.5
  Top Layer w1.5: J50.03 U4.VSYS
"RPI PICO PIN40": J47.01 J48.01 J50.01 U4.VBUS | length 15.5
  Top Layer w1.5: J50.01 U4.VBUS
pads on no net: J1. J51. J52.

## Text inside footprints (layer, text, board x,y; h text height)
C1: Top Overlay "+" at 38.596,114.984 h1.5 r90
C2: Top Overlay "+" at 45.982,104.9 h1 r270
C3: Top Overlay "+" at 38.596,98.768 h1.5 r90
C4: Top Overlay "+" at 45.982,88.66 h1 r270
C5: Top Overlay "+" at 38.596,82.679 h1.5 r90
C6: Top Overlay "+" at 45.982,72.658 h1 r270
U4: Top Overlay "rasberry pi pico" at 93.345,42.037 h2.54 r180; Top Overlay ">NAME" at 99.695,56.007 h2.54 r180